# Altium PCB PCB_PCB_dayi_hossein_SSG_2_2025-04-10.pcbdoc
Units mm, origin at the board's own origin, x right, y up, seen from the top; angles counter-clockwise.
Board outline 85 x 50 mm, 2 copper layers (Top Layer, Bottom Layer); 16 components, 28 nets, 56 pads, 0 vias.
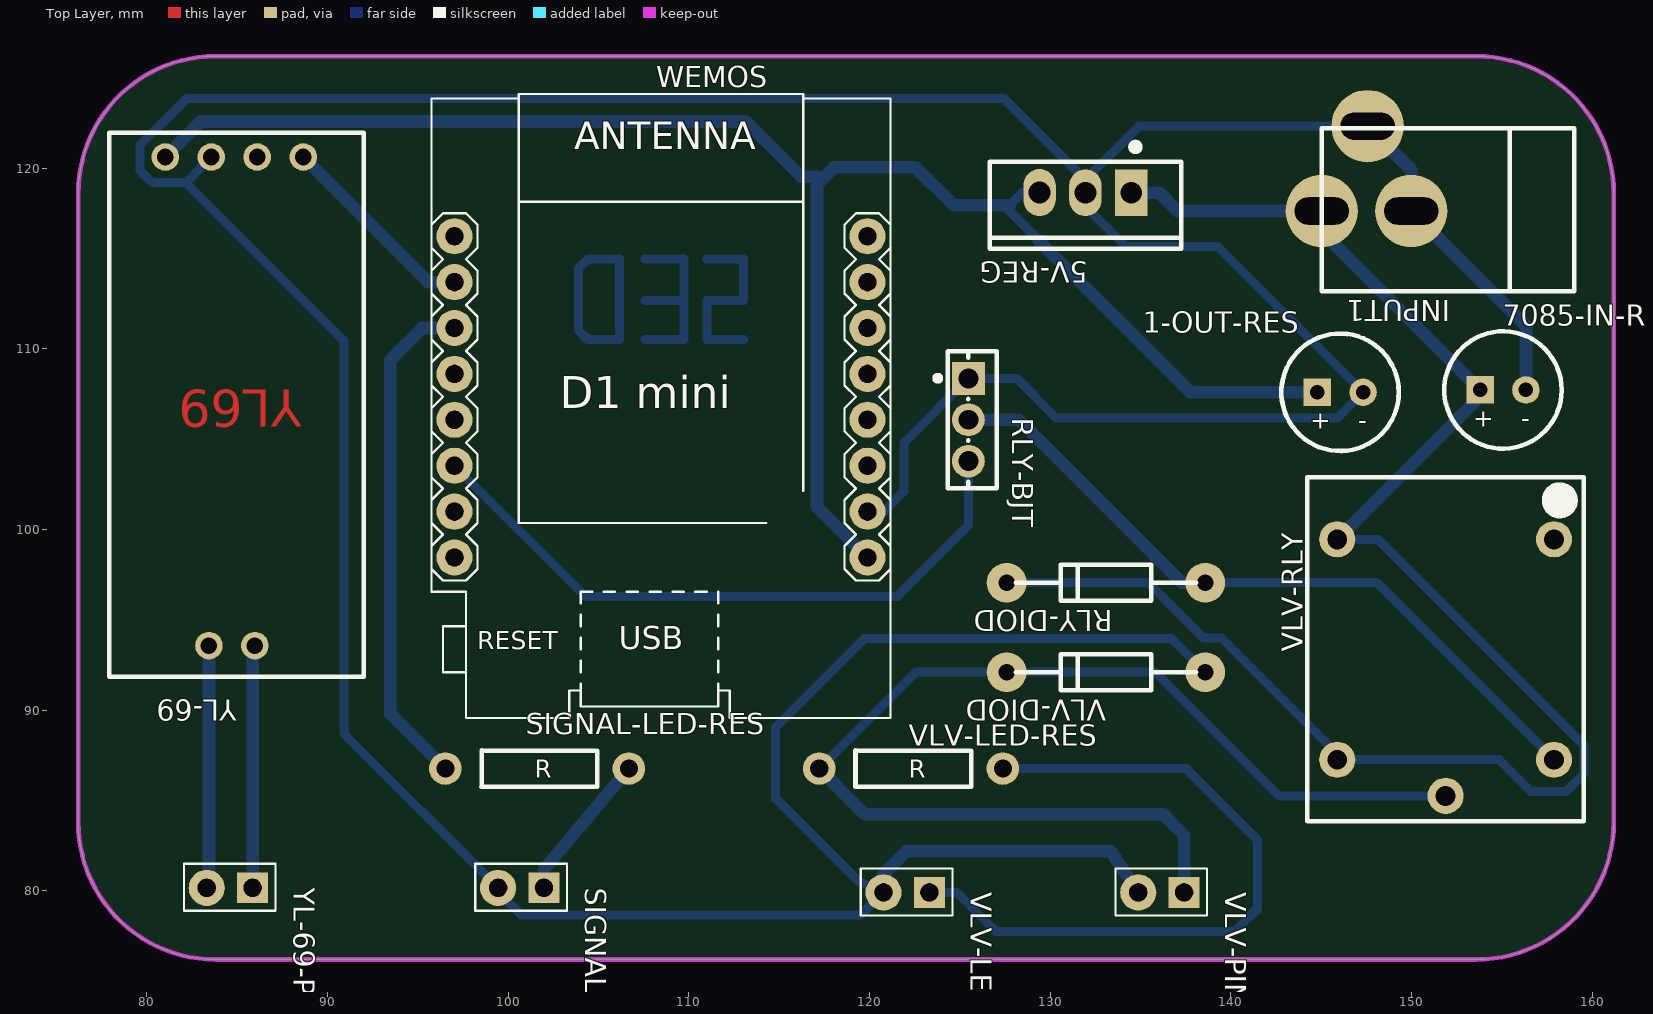
[diagram p0: Top Layer view]
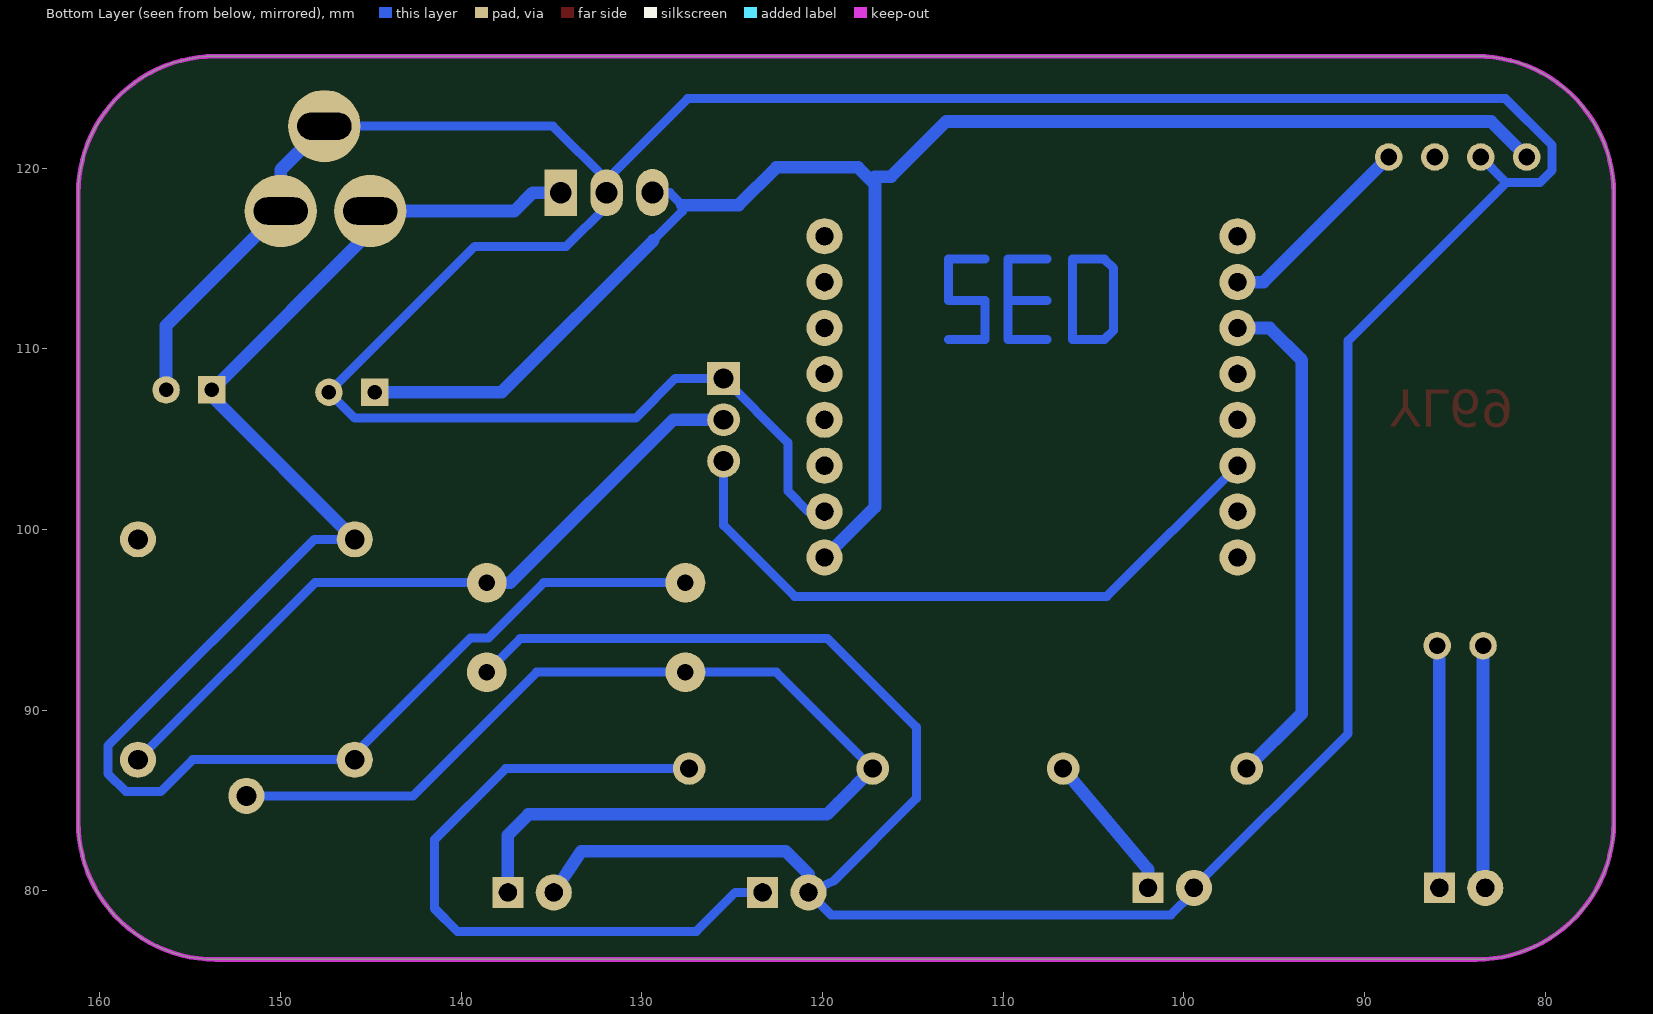
[diagram p1: Bottom Layer view, seen from below]

## Layer stack, top to bottom
Top Layer: signal copper (thickness not stored)
Dielectric: dielectric 0.32, FR-4, Dk 4.8
Bottom Layer: signal copper (thickness not stored)

## Board outline
161.2,83.8 cw(c153.6,83.8) 153.6,76.2 83.8,76.2 cw(c83.8,83.8) 76.2,83.8 76.2,118.6 cw(c83.8,118.6) 83.8,126.2 153.6,126.2 cw(c153.6,118.6) 161.2,118.6

## Design rules (kind name [scope] priority, off if disabled: settings)
Clearance Default [All] p1: gap=0.178 ignorepadtopadclearanceinfootprint=FALSE except(0: Region-Region; 0.399: Track-Track SMDPad-Track THPad-Track Via-Track Fill-Track Region-Track Poly-Track Text-Track Sheet-Track Hole-Track Track-SMDPad SMDPad-SMDPad THPad-SMDPad Via-SMDPad Fill-SMDPad Region-SMDPad Poly-SMDPad Text-SMDPad Sheet-SMDPad Hole-SMDPad Track-THPad SMDPad-THPad THPad-THPad Via-THPad Fill-THPad Region-THPad Poly-THPad Text-THPad Sheet-THPad Hole-THPad Track-Via SMDPad-Via THPad-Via Via-Via Fill-Via Region-Via Poly-Via Text-Via Sheet-Via Hole-Via Track-Fill SMDPad-Fill THPad-Fill Via-Fill Fill-Fill Region-Fill Poly-Fill Text-Fill Sheet-Fill Hole-Fill Track-Region SMDPad-Region THPad-Region Via-Region Fill-Region Poly-Region Text-Region Sheet-Region Hole-Region Track-Poly SMDPad-Poly THPad-Poly Via-Poly Fill-Poly Region-Poly Poly-Poly Text-Poly Sheet-Poly Hole-Poly Track-Text SMDPad-Text THPad-Text Via-Text Fill-Text Region-Text Poly-Text Text-Text Sheet-Text Hole-Text Track-Sheet SMDPad-Sheet THPad-Sheet Via-Sheet Fill-Sheet Region-Sheet Poly-Sheet Text-Sheet Sheet-Sheet Hole-Sheet Track-Hole SMDPad-Hole THPad-Hole Via-Hole Fill-Hole Region-Hole Poly-Hole Text-Hole Sheet-Hole Hole-Hole)
PasteMaskExpansion Common [All] p1:
PlaneConnect Default [All] p1: planeconnectstyle=Relief reliefexpansion=0.508 reliefentries=4 reliefconductorwidth=0 reliefairgap=0.025
PolygonConnect Default [All] p1: connectstyle=Relief reliefentries=4 polygonreliefangle="90 Angle" airgapwidth=10
RoutingVias Default [All] p1: viastyle="Through Hole" holewidth=15.748 minholewidth=15.748 maxholewidth=2362 width=27.559 minwidth=27.559 maxwidth=3938
SolderMaskExpansion Common [All] p1: useseparateexpansions=TRUE expansion=2 expansionbottom=2
Width Default [All] p1: maxlimit=1000 minlimit=20 preferedwidth=20

## Components (designator, comment, footprint, x,y, rotation, side; value= is the part's Value field where it differs from the comment)
1-OUT-RES "10uF" "CAPACITOR, 100UF 2.54MM PIN CAPACITOR" 146.05,107.598 r0 top
5V-REG "LM7805T" TO-220-3_L10.0-W4.5-P2.54-L 131.953,118.647 r180 top
7085-IN-RES "33uF" "CAPACITOR, 100UF 2.54MM PIN CAPACITOR" 155.067,107.725 r0 top
INPUT1 "12V JACK" "12V JACK" 159.004,113.186 r180 top
RLY-BJT "BD137" TO-126-3_L7.6-W2.7-P2.30-L 125.476,106.074 r270 top
RLY-DIOD "1N4007" DIODE_1N4007 132.588,97.057 r180 top
SIGNAL-LED "2.45MM_1*2_PIN" CONNECTOR_PINHEADER_2.54MM:PINHEADER_1X11_P_2.54MM 101.981,80.166 r270 top
SIGNAL-LED-RES "180-220 ohm" "RESISTOR (UPDATED HOLES)" 101.6,86.77 r0 top
VLV-DIOD "1N4007" DIODE_1N4007 132.588,92.104 r180 top
VLV-LED "2.45MM_1*2_PIN" CONNECTOR_PINHEADER_2.54MM:PINHEADER_1X11_P_2.54MM 123.317,79.912 r270 top
VLV-LED-RES "490-510 ohm" "RESISTOR (UPDATED HOLES)" 122.301,86.77 r0 top
VLV-PINS "2.45MM_1*2_PIN" CONNECTOR_PINHEADER_2.54MM:PINHEADER_1X11_P_2.54MM 137.414,79.912 r270 top
VLV-RLY "Relay - 12V" RELAY-TH_BC_JQC-3FB-S-XXX-1Z11 151.892,92.358 r90 top
WEMOS "WEMOS_D1_MINI_PRO4" DIP-16_WEMOS_D1_MINI_PRO4 108.458,107.344 r0 top
YL-69 "YL-69" footprint_017c 84.963,105.693 r180 top
YL-69-PINS "2.45MM_1*2_PIN" CONNECTOR_PINHEADER_2.54MM:PINHEADER_1X11_P_2.54MM 85.852,80.166 r270 top

## Footprints (in the part's own frame and the unit in brackets; to place one, negate y for a bottom-side part, rotate by r counter-clockwise, add the part's x,y. Pads: shape width x height; smd on the part's side, far side on the other; paste and mask are expansions set on the pad)
"12V JACK" [mm]
  round 4 hole 1.5 slot 3 at 0 deg: GND(9.017,-4.445) GND(11.43,-9.144) Vcc(13.97,-4.445)
  silkscreen extent 0,-9.02 13.97,0
"CAPACITOR, 100UF 2.54MM PIN CAPACITOR" [mm]
  rect 1.52x1.52 hole 0.8: 1(-1.27,0)
  round 1.52 hole 0.8: 2(1.27,0)
  silkscreen extent -3.25,-3.25 3.25,3.25
CONNECTOR_PINHEADER_2.54MM:PINHEADER_1X11_P_2.54MM [mm]
  rect 1.7x1.7 hole 1 slot 1.005 at 0 deg: 1(0,0)
  round 2 hole 1 slot 1.005 at 0 deg: 2(0,-2.54)
  silkscreen extent -1.33,-3.8 1.27,1.27
DIODE_1N4007 [mm]
  round 2.2 hole 0.914: 1(-6,0) 2(5,0)
  silkscreen extent -5.5,-1 4.5,1
DIP-16_WEMOS_D1_MINI_PRO4 [mm]
  round 2 hole 1: 1(11.43,8.89) 2(11.43,6.35) 3(11.43,3.81) 4(11.43,1.27) 5(11.43,-1.27) 6(11.43,-3.81) 7(11.43,-6.35) 8(11.43,-8.89) 9(-11.43,8.89) 10(-11.43,6.35) 11(-11.43,3.81) 12(-11.43,1.27) 13(-11.43,-1.27) 14(-11.43,-3.81) 15(-11.43,-6.35) 16(-11.43,-8.89)
  silkscreen extent -12.7,-17.78 12.7,16.76
footprint_017c [mil]
  round 60 hole 36: 1(-145.53,-587.7) 2(-45.02,-587.7) 3(55.02,-587.7) 4(155.11,-587.7) 5(-40.02,477.3) 6(60.02,477.3)
  silkscreen extent -278,-640 278,545
RELAY-TH_BC_JQC-3FB-S-XXX-1Z11 [mm]
  round 2 hole 1.1: 11(-7.1,0) 12(7.1,-6) 14(7.1,6) A1(-5.1,-6) A2(-5.1,6)
  silkscreen extent -8.5,-7.65 10.54,7.65
"RESISTOR (UPDATED HOLES)" [mm]
  round 1.8 hole 1: 1(-5.08,0) 2(5.08,0)
  silkscreen extent -3.08,-1.02 3.33,1.01
TO-126-3_L7.6-W2.7-P2.30-L [mil]
  rect 71.5x71.5 hole 43.31: 1(-90.16,0)
  round 71.5 hole 43.31: 2(0,0) 3(90.16,0)
  silkscreen extent -150,-73 150,62
TO-220-3_L10.0-W4.5-P2.54-L [mm]
  rect 1.8x2.6 hole 1.2: 1(-2.54,0.005)
  oval 1.8x2.6 hole 1.2: 2(0,0.005)
  oval 1.8x2.6 hole 1.2 copper offset 0,0: 3(2.541,-0.005)
  silkscreen extent -5.3,-2.73 5.3,3.09

## Nets (pads, with @x,y where several pads share a name; then routed paths per layer and width w, separated by ;. In a path a pad name is that pad's centre, name@x,y a point inside that pad or via, vN(x,y) a via of type N, cw(c..) or ccw(c..) an arc to the next point about the centre after c; other vN are vias at no path point)
+5V: 1-OUT-RES.1 5V-REG.3 WEMOS.8 YL-69.4 | length 114.7
  Bottom Layer w0.5: 5V-REG.3 128.453,118.652 127.757,117.957 127.757,117.609 137.768,107.598 1-OUT-RES.1
  Bottom Layer w0.7: YL-69.4 82.987,122.584 113.157,122.584 116.205,119.536 117.094,119.536 117.094,101.248 WEMOS.8 ; 117.094,119.111 118.027,120.044 122.555,120.044 124.642,117.957 127.757,117.957 ; 129.361,116.005 137.768,107.598 1-OUT-RES.1
GND: 
S$171047:  | length 10.9
  Bottom Layer w0.5: 107.569,110.519 109.728,110.519 109.728,112.678 ; 107.569,112.678 109.728,112.678 ; 107.569,114.964 109.728,114.964 109.728,112.678
S$171098:  | length 12.9
  Bottom Layer w0.5: 103.886,111.027 103.886,114.456 104.394,114.964 106.172,114.964 106.172,110.519 104.394,110.519 103.886,111.027
S$171102:  | length 10.5
  Bottom Layer w0.5: 110.998,114.964 113.03,114.964 113.03,112.678 110.998,112.678 110.998,110.519 113.03,110.519
SIGNAL-LED-RES_2: SIGNAL-LED-RES.2 SIGNAL-LED.1 | length 8.3
  Bottom Layer w0.7: SIGNAL-LED.1 101.981,81.182 SIGNAL-LED-RES.2
VCC: 5V-REG.1 7085-IN-RES.1 INPUT1.Vcc RLY-DIOD.2 VLV-RLY.14 VLV-RLY.A2 | length 93.3
  Bottom Layer w0.5: RLY-DIOD.2 135.431,97.057 138.495,93.992 139.494,93.992 145.892,87.595 VLV-RLY.A2 154.86,87.258 156.631,85.487 158.553,85.487 159.553,86.487 159.553,88.026 148.12,99.458 VLV-RLY.14
  Bottom Layer w0.7: 5V-REG.1 136.044,118.642 137.055,117.631 INPUT1.Vcc 145.034,116.488 7085-IN-RES.1 153.797,107.363 VLV-RLY.14
VLV-LED-RES_2: VLV-LED-RES.2 VLV-LED.1 | length 39.1
  Bottom Layer w0.5: VLV-LED.1 124.817,79.912 ; 124.818,79.912 126.977,77.753 140.208,77.753 141.478,79.023 141.478,82.833 137.541,86.77 VLV-LED-RES.2
VLV-RLY_11: VLV-DIOD.2 VLV-LED-RES.1 VLV-PINS.1 VLV-RLY.11 | length 64.6
  Bottom Layer w0.5: VLV-LED-RES.1 122.555,92.104 VLV-DIOD.2 135.819,92.104 142.665,85.258 VLV-RLY.11
  Bottom Layer w0.7: VLV-LED-RES.1 119.126,84.865 119.761,84.23 136.271,84.23 137.414,83.087 VLV-PINS.1
VLV-RLY_12: VLV-RLY.12
VLV-RLY_A1: RLY-BJT.2 RLY-DIOD.1 VLV-RLY.A1 | length 40.2
  Bottom Layer w0.5: RLY-DIOD.1 148.093,97.057 VLV-RLY.A1
  Bottom Layer w0.7: RLY-BJT.2 128.27,106.074 137.287,97.057 RLY-DIOD.1
WEMOS_1: WEMOS.1
WEMOS_2: WEMOS.2
WEMOS_3: WEMOS.3
WEMOS_4: WEMOS.4
WEMOS_5: WEMOS.5
WEMOS_6: WEMOS.6
WEMOS_9: WEMOS.9
WEMOS_10: WEMOS.10 YL-69.1 | length 11.2
  Bottom Layer w0.7: YL-69.1 95.586,113.694 WEMOS.10
WEMOS_11: SIGNAL-LED-RES.1 WEMOS.11 | length 28.2
  Bottom Layer w0.7: SIGNAL-LED-RES.1 93.472,89.818 93.472,109.376 95.25,111.154 WEMOS.11
WEMOS_12: WEMOS.12
WEMOS_13: WEMOS.13
WEMOS_14: RLY-BJT.3 WEMOS.14 | length 36.6
  Bottom Layer w0.5: WEMOS.14 104.267,96.295 121.539,96.295 125.476,100.232 RLY-BJT.3@125.476,103.783
WEMOS_15: WEMOS.15
WEMOS_16: WEMOS.16
YL69_2: YL-69.2
YL69_5: YL-69-PINS.1 YL-69.5 | length 13.5
  Bottom Layer w0.7: YL-69-PINS.1 85.852,93.442 YL-69.5
YL69_6: YL-69-PINS.2 YL-69.6 | length 13.5
  Bottom Layer w0.7: YL-69-PINS.2 83.438,80.292 YL-69.6
pads on no net: 1-OUT-RES.2 5V-REG.2 7085-IN-RES.2 INPUT1.GND RLY-BJT.1 SIGNAL-LED.2 VLV-DIOD.1 VLV-LED.2 VLV-PINS.2 WEMOS.7 YL-69.3
copper on no net: | length 295
  Bottom Layer w0.5: 82.151,119.208 80.294,119.208 79.609,119.894 79.609,121.268 82.194,123.854 127.462,123.854 131.953,119.363 ; 83.565,120.621 82.152,119.207 90.909,110.45 90.909,88.698 99.441,80.166 99.441,79.934 100.711,78.664 119.529,78.664 120.777,79.912 ; 119.888,100.994 120.777,100.994 121.917,102.134 121.917,104.804 125.476,108.365 ; 121.179,80.545 120.777,80.144 120.777,79.912 ; 125.476,107.774 125.476,108.364 128.139,108.364 130.338,106.165 145.887,106.165 147.32,107.598 139.248,115.67 134.189,115.67 131.953,117.907 131.953,118.642 131.953,119.362 134.921,122.33 147.574,122.33 149.987,119.917 149.987,117.631 156.337,111.281 156.337,107.725 ; 138.587,92.104 136.731,93.961 119.713,93.961 114.808,89.056 114.808,85.119 119.383,80.544 120.777,79.912
  Bottom Layer w0.7: 120.777,79.912 120.777,80.928 122.047,82.198 133.35,82.198 134.874,79.912 ; 147.574,122.33 149.987,119.917 149.987,117.631 156.337,111.281 156.337,107.725

## Keep-outs
Board Outline Layer:
  the board outline again, w0.254

## Text inside footprints (layer, text, board x,y; h text height)
1-OUT-RES: Top Silkscreen Layer "-" at 147.066,105.566 h1; Top Silkscreen Layer "+" at 144.399,105.566 h1
7085-IN-RES: Top Silkscreen Layer "-" at 156.083,105.693 h1; Top Silkscreen Layer "+" at 153.416,105.693 h1
SIGNAL-LED-RES: Top Silkscreen Layer "R" at 101.473,86.262 h1
VLV-LED-RES: Top Silkscreen Layer "R" at 122.174,86.262 h1
WEMOS: Top Silkscreen Layer "ANTENNA" at 103.657,121.06 h1.52; Top Silkscreen Layer "D1 mini" at 102.857,106.709 h1.78; Top Silkscreen Layer "RESET" at 98.298,93.374 h1.02; Top Silkscreen Layer "USB" at 106.108,93.374 h1.27
YL-69: Top Layer "YL69" at 88.582,107.73 h2.03 r180